# Altium PCB NodeMCU.PcbDoc
Units mm, origin at the board's own origin, x right, y up, seen from the top; angles counter-clockwise.
Board outline 100.36 x 67.08 mm, 2 copper layers (Top Layer, Bottom Layer); 31 components, 34 nets, 202 pads, 11 vias.
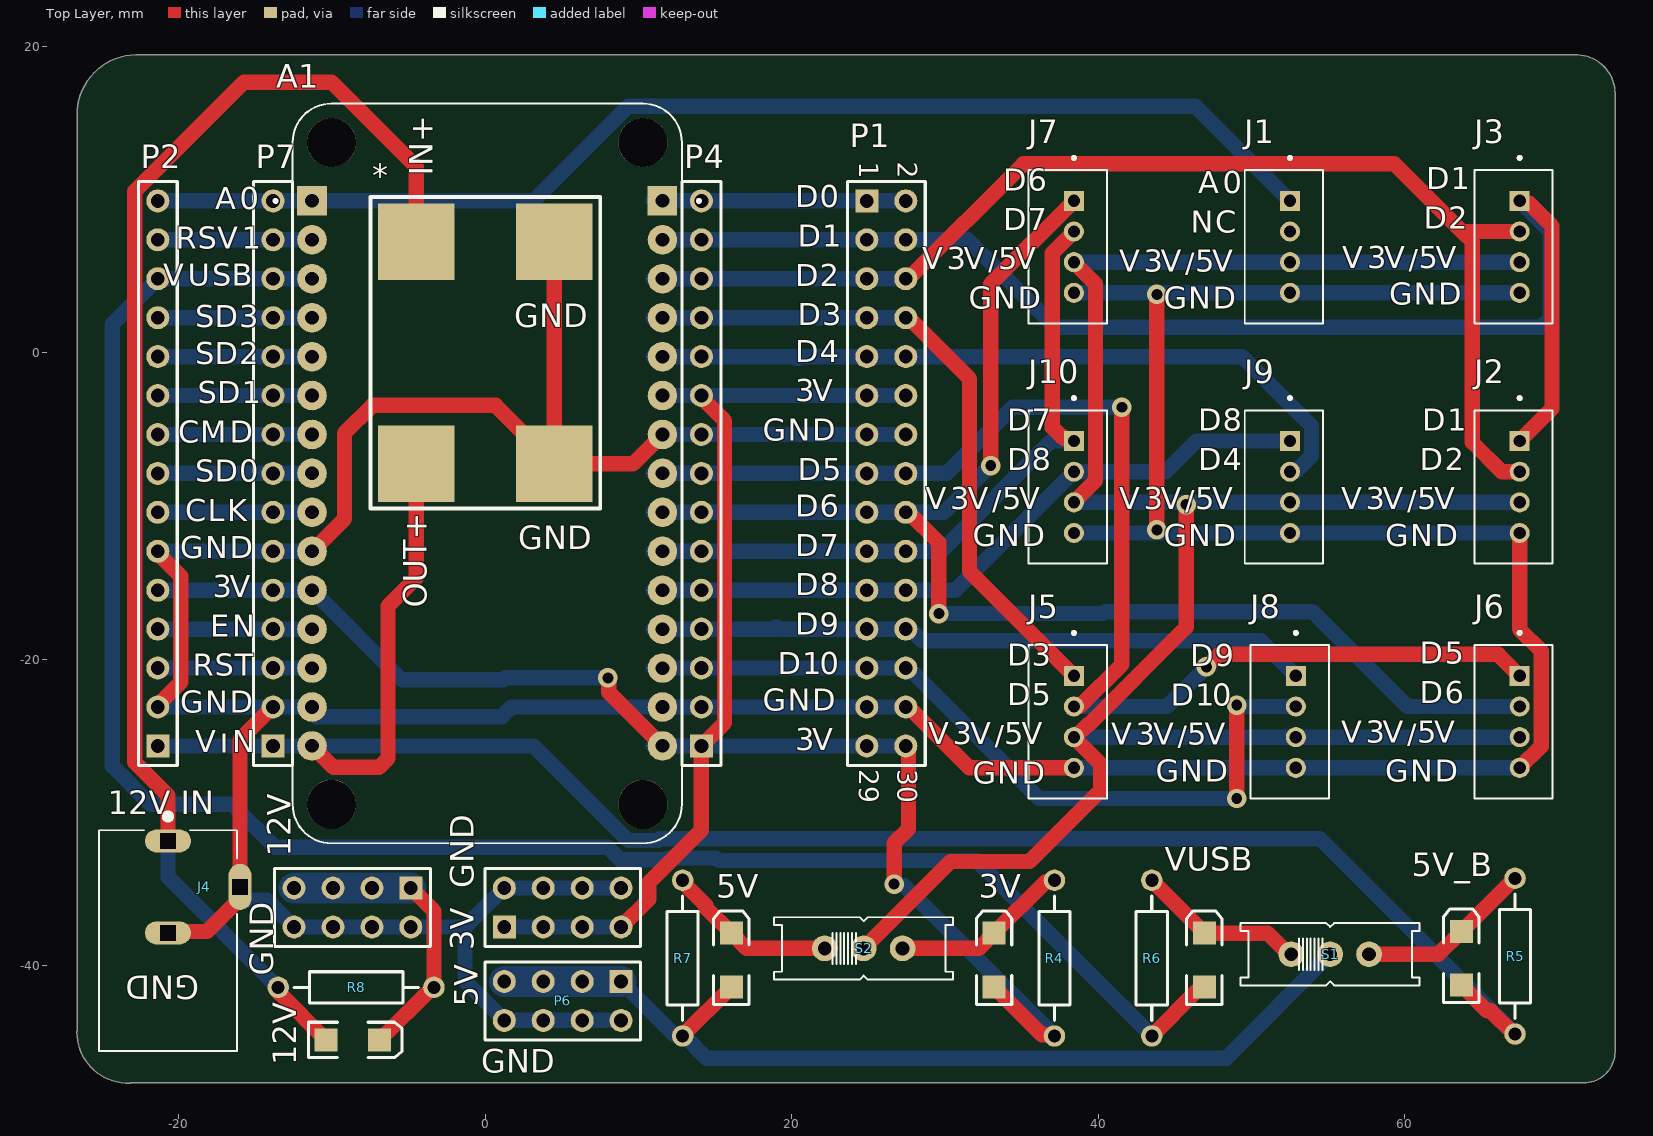
[diagram p0: Top Layer view]
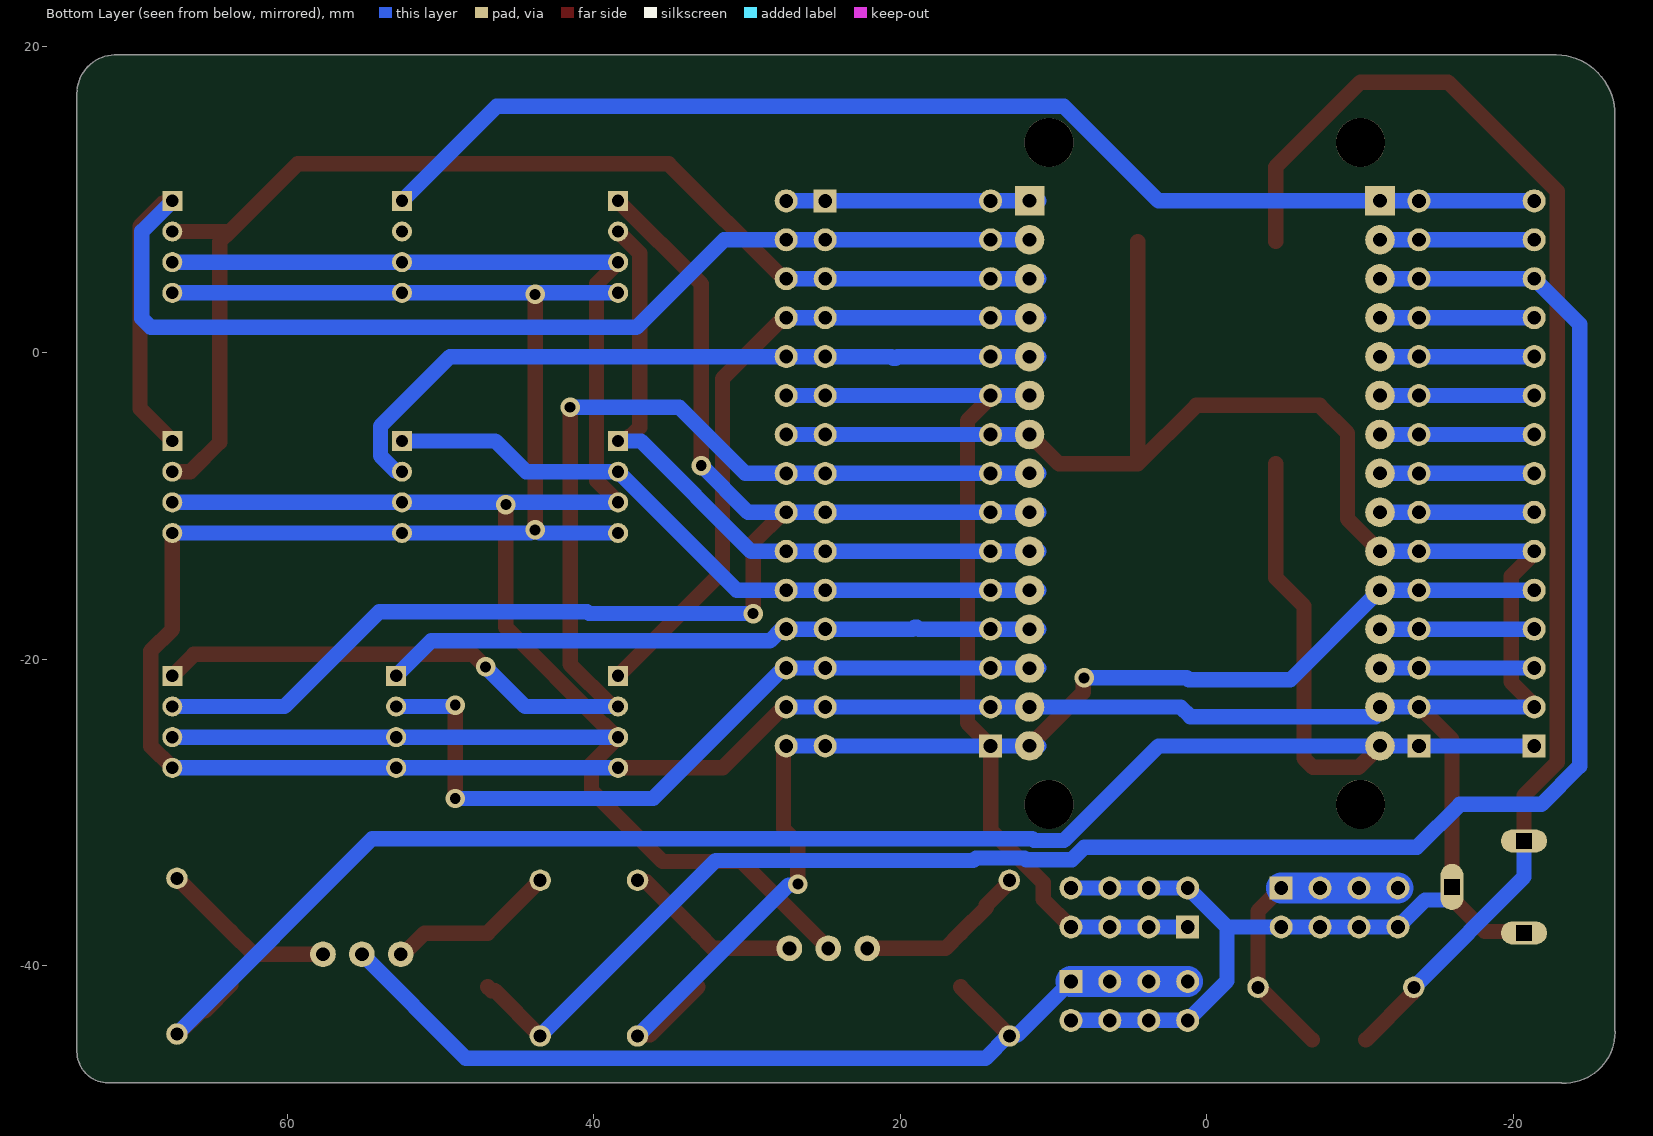
[diagram p1: Bottom Layer view, seen from below]

## Layer stack, top to bottom
Top Solder: solder mask 0.0102, Solder Resist, Dk 3.5
Top Layer: signal copper 0.0356
Dielectric 1: dielectric 0.32, FR-4, Dk 4.8
Bottom Layer: signal copper 0.0356
Bottom Solder: solder mask 0.0102, Solder Resist, Dk 3.5

## Board outline
-26.646,-44.323 ccw(c-23.321,-44.323) -23.188,-47.646 ccw(c-23.193,-47.518) -23.124,-47.625 71.674,-47.625 71.675,-47.625 ccw(c71.675,-45.593) 73.708,-45.593 ccw(c73.58,-45.593) 73.705,-45.569 ccw(c73.58,-45.546) 73.708,-45.546 73.708,16.761 ccw(c71.167,16.891) 73.711,16.891 ccw(c71.167,16.891) 71.037,19.431 -22.813,19.431 ccw(c-22.813,19.304) -22.816,19.431 cw(c-22.814,19.317) -22.815,19.431 -22.816,19.431 ccw(c-22.749,15.557) -26.623,15.493 ccw(c-22.414,15.563) -26.623,15.492 -26.623,15.493 -26.623,-44.25 ccw(c-26.519,-44.323)

## Design rules (kind name [scope] priority, off if disabled: settings)
Clearance [All] p1: gap=0.254 ignorepadtopadclearanceinfootprint=FALSE except(0: Arc-Hole Track-Hole SMDPad-Hole THPad-Hole Via-Hole Fill-Hole Poly-Hole Region-Hole Text-Hole)
ComponentClearance [All] p1 off: gap=0.254 collisioncheckmode=3 verticalgap=0.254 showdistances=FALSE
Height [All] p1 off: minheight=0 maxheight=25.4 prefheight=12.7
PolygonConnect [All] p1: connectstyle=Relief reliefconductorwidth=0.254 reliefentries=4 polygonreliefangle="90 Angle" airgapwidth=0.254
RoutingVias [All] p1: holewidth=0.711 width=1.27 viastyle="Through Hole" minholewidth=0.711 minwidth=1.27 maxholewidth=0.711 maxwidth=1.27
SolderMaskExpansion [All] p1: expansion=0.102 istentingtop=FALSE
Width [All] p1: maxlimit=10 minlimit=0.254 preferedwidth=1 minimp=50.000000 maximp=50.000000 favimp=50.000000
28 further rules are at their usual default settings.

## Classes and differential pairs
component class "node MCU": 3V 5V 5V_B 12V * A1 J1 J2 J3 J4 J5 J6 J7 J8 J9 J10 P1 P2 P4 P6 P7 R4 R5 R6 R7 R8 S1 S2 VUSB

## Components (designator, comment, footprint, x,y, rotation, side; value= is the part's Value field where it differs from the comment)
3V "LED2" 3.2X1.6X1.1 33.194,-39.624 r90 top (schematic designator D2)
3V "Header 4X2" HDR2X4 1.239,-37.465 r0 top (schematic designator P5)
5V "LED2" 3.2X1.6X1.1 16.049,-39.624 r90 top (schematic designator D5)
5V_B "LED2" 3.2X1.6X1.1 63.674,-39.497 r90 top (schematic designator D3)
12V "LED2" 3.2X1.6X1.1 -8.636,-44.831 r0 top (schematic designator D6)
12V "Header 4X2" HDR2X4 -4.857,-34.925 r180 top (schematic designator P8)
* "microbuck" "Micro buck" 0,0 r0 top
A1 "113990105" SEEED_113990105 0.127,-7.874 r0 top
J1 "110990030" SEEED_110990030 52.498,6.906 r270 top
J2 "110990030" SEEED_110990030 67.484,-8.763 r270 top
J3 "110990030" SEEED_110990030 67.484,6.906 r270 top
J4 "PJ-102A" CUI_PJ-102A -20.701,-38.354 r270 top
J5 "110990030" SEEED_110990030 38.401,-24.082 r270 top
J6 "110990030" SEEED_110990030 67.484,-24.082 r270 top
J7 "110990030" SEEED_110990030 38.401,6.906 r270 top
J8 "110990030" SEEED_110990030 52.879,-24.082 r270 top
J9 "110990030" SEEED_110990030 52.498,-8.763 r270 top
J10 "110990030" SEEED_110990030 38.401,-8.763 r270 top
P1 "Header 15X2" HDR2X15 24.892,9.906 r270 top
P2 "Header 15" HDR1X15 -21.367,-25.654 r90 top
P4 "Header 15" HDR1X15 14.097,-25.654 r90 top
P6 "Header 4X2" HDR2X4 8.859,-41.021 r180 top
P7 "Header 15" HDR1X15 -13.843,-25.654 r90 top
R4 "Res2" AXIAL-0.4 37.131,-39.497 r90 top value=1K
R5 "Res2" AXIAL-0.4 67.183,-39.37 r90 top value=1K
R6 "Res2" AXIAL-0.4 43.481,-39.497 r90 top value=1K
R7 "Res2" AXIAL-0.4 12.874,-39.497 r90 top value=1K
R8 "Res2" AXIAL-0.4 -8.429,-41.402 r0 top value=1K
S1 "EG1218" EG1218 55.118,-39.243 r0 top
S2 "EG1218" EG1218 24.685,-38.862 r0 top
VUSB "LED2" 3.2X1.6X1.1 46.91,-39.624 r90 top (schematic designator D4)

## Footprints (in the part's own frame and the unit in brackets; to place one, negate y for a bottom-side part, rotate by r counter-clockwise, add the part's x,y. Pads: shape width x height; smd on the part's side, far side on the other; paste and mask are expansions set on the pad)
3.2X1.6X1.1 [mm] "SMT LED; 2 Flat Leads"
  rect 1.5x1.5 smd: 1(-1.75,0) 2(1.75,0)
  silkscreen extent -2.9,-1.15 3.2,1.15
AXIAL-0.4 [mm] "Axial Device, Thru-Hole; 2 Leads; 0.4 in Pin Spacing"
  round 1.4 hole 0.85: 1(-5.08,0) 2(5.08,0)
  silkscreen extent -4.06,-1.02 4.06,1.02
CUI_PJ-102A [mm]
  oval 1.508x3.016 hole 1 square: 1(-6.5,0) 2(-0.5,0)
  oval 3.016x1.508 hole 1 square: 3(-3.5,4.7)
  silkscreen extent -8.3,-4.5 7.2,4.5, body extent -7.2,-4.5 7.2,4.9, height 11
EG1218 [mil]
  round 66 hole 35.43: O(-100,0) P(0,0) S(100,0)
  silkscreen extent -230,-80 230,80, body extent -228,-276 228,201, height 79
HDR1X15 [mm] "Connector; Header; 15 Position"
  rect 1.5x1.5 hole 0.9: 1(0,0)
  round 1.5 hole 0.9: 2(2.54,0) 3(5.08,0) 4(7.62,0) 5(10.16,0) 6(12.7,0) 7(15.24,0) 8(17.78,0) 9(20.32,0) 10(22.86,0) 11(25.4,0) 12(27.94,0) 13(30.48,0) 14(33.02,0) 15(35.56,0)
  silkscreen extent -1.27,-1.27 36.83,1.27
HDR2X4 [mm] "Connector; Header; 4x2 Position"
  rect 1.5x1.5 hole 0.9: 1(0,0)
  round 1.5 hole 0.9: 2(0,2.54) 3(2.54,0) 4(2.54,2.54) 5(5.08,0) 6(5.08,2.54) 7(7.62,0) 8(7.62,2.54)
  silkscreen extent -1.27,-1.27 8.89,3.81
HDR2X15 [mm] "Connector; Header; 15x2 Position"
  rect 1.5x1.5 hole 0.9: 1(0,0)
  round 1.5 hole 0.9: 2(0,2.54) 3(2.54,0) 4(2.54,2.54) 5(5.08,0) 6(5.08,2.54) 7(7.62,0) 8(7.62,2.54) 9(10.16,0) 10(10.16,2.54) 11(12.7,0) 12(12.7,2.54) 13(15.24,0) 14(15.24,2.54) 15(17.78,0) 16(17.78,2.54) 17(20.32,0) 18(20.32,2.54) 19(22.86,0) 20(22.86,2.54) 21(25.4,0) 22(25.4,2.54) 23(27.94,0) 24(27.94,2.54) 25(30.48,0) 26(30.48,2.54) 27(33.02,0) 28(33.02,2.54) 29(35.56,0) 30(35.56,2.54)
  silkscreen extent -1.27,-1.27 36.83,3.81
"Micro buck" [mm]
  rect 5x5 smd: 1(-4.5,7.25) 2(4.5,7.25) 3(-4.5,-7.25) 4(4.5,-7.25)
  silkscreen extent -7.5,-10.16 7.5,10.16
SEEED_110990030 [mm]
  rect 1.308x1.308 hole 0.8: 1(-3,0)
  round 1.308 hole 0.8: 2(-1,0) 3(1,0) 4(3,0)
  silkscreen extent -5.9,-2.95 5,2.15
SEEED_113990105 [mm]
  rect 1.93x1.93 / inner round 1.93 / far side rect 1.93x1.93 hole 0.889: J1_1(-11.43,17.78) J2_1(11.43,17.78)
  round 1.93 hole 0.889: J1_2(-11.43,15.24) J1_3(-11.43,12.7) J1_4(-11.43,10.16) J1_5(-11.43,7.62) J1_6(-11.43,5.08) J1_7(-11.43,2.54) J1_8(-11.43,0) J1_9(-11.43,-2.54) J1_10(-11.43,-5.08) J1_11(-11.43,-7.62) J1_12(-11.43,-10.16) J1_13(-11.43,-12.7) J1_14(-11.43,-15.24) J1_15(-11.43,-17.78) J2_2(11.43,15.24) J2_3(11.43,12.7) J2_4(11.43,10.16) J2_5(11.43,7.62) J2_6(11.43,5.08) J2_7(11.43,2.54) J2_8(11.43,0) J2_9(11.43,-2.54) J2_10(11.43,-5.08) J2_11(11.43,-7.62) J2_12(11.43,-10.16) J2_13(11.43,-12.7) J2_14(11.43,-15.24) J2_15(11.43,-17.78)
  round 3.2 hole 3.2 unplated: ""(-10.16,-21.59) ""(-10.16,21.59) ""(10.16,-21.59) ""(10.16,21.59)
  silkscreen extent -13.91,-24.13 13.91,24.13

## Part data
3V 5V 5V_B 12V VUSB: "Typical RED, GREEN, YELLOW, AMBER GaAs LED", LatestRevisionDate=17-Jul-2002, LatestRevisionNote="Re-released for DXP Platform.", PackageDescription="SM LED; 2 Flat Leads", PackageReference=3.2X1.6X1.1, PackageVersion=Feb-2002, Published=8-Jun-2000, Publisher="Altium Limited"
3V 12V P6: "Header, 4-Pin, Dual row", LatestRevisionDate=17-Jul-2002, LatestRevisionNote="Re-released for DXP Platform.", Publisher="Altium Limited"
A1: "- ESP8266 Transceiver; 802.11 b/g (Wi-Fi, WiFi, WLAN) 2.4GHz Evaluation Board", Package=None, Availability="In Stock", Check_prices=https://www.snapeda.com/parts/113990105/Seeed+Technology+Co.%252C+Ltd/view-part/?ref=eda, MF="Seeed Technology Co., Ltd", MP=113990105, Price=None, Purchase-URL=https://pricing.snapeda.com/search/part/113990105/?ref=eda, SnapEDA_Link=https://www.snapeda.com/parts/113990105/Seeed+Technology+Co.%252C+Ltd/view-part/?ref=snap
J1 J2 J3 J5 J6 J7 J8 J9 J10: "GROVE 2MM 4PIN VERT CONN 10PCS", Package=None, Arrow_Electronics-Purchase-URL=https://snapeda.com/shop?store=Arrow+Electronics&id=583576, Availability=Good, MF="Seeed Technology", Mouser-Purchase-URL=https://snapeda.com/shop?store=Mouser&id=583576, MP=110990030, Price=None, SnapEDA_Link=https://www.snapeda.com/parts/110990030/Seeed%20Technology%20Co.,%20Ltd/view-part/583576/?ref=snap
J4: "2.0 x 6.5 mm, 2.5 A, Horizontal, Through Hole, Tapered Pins, Dc Power Jack Connector", Package=None, Availability="In Stock", Check_prices=https://www.snapeda.com/parts/PJ-102A/CUI+Devices/view-part/?ref=eda, CUI_purchase_URL=https://www.cuidevices.com/product/interconnect/connectors/dc-power-connectors/jacks/pj-102a?utm_source=snapeda.com&utm_medium=referral&utm_campaign=snapedaBOM, MF="CUI Devices", MP=PJ-102A, Price=None, Purchase-URL=https://pricing.snapeda.com/search/part/PJ-102A/?ref=eda, SnapEDA_Link=https://www.snapeda.com/parts/PJ-102A/CUI+Devices/view-part/?ref=snap
P1: "Header, 15-Pin, Dual row", LatestRevisionDate=17-Jul-2002, LatestRevisionNote="Re-released for DXP Platform.", Publisher="Altium Limited"
P2 P4 P7: "Header, 15-Pin", LatestRevisionDate=17-Jul-2002, LatestRevisionNote="Re-released for DXP Platform.", Publisher="Altium Limited"
R4 R5 R6 R7 R8: "Resistor", LatestRevisionDate=17-Jul-2002, LatestRevisionNote="Re-released for DXP Platform.", PackageDescription="Axial Device, Thru-Hole; 2 Leads; 0.4 in Pin Spacing", PackageReference=AXIAL-0.4, Published=8-Jun-2000, Publisher="Altium Limited"
S1 S2: "Slide Switch SPDT Through Hole", Package=None, Availability="In Stock", Check_prices=https://www.snapeda.com/parts/EG1218/E-Switch/view-part/?ref=eda, MF=E-Switch, MP=EG1218, Price=None, Purchase-URL=https://pricing.snapeda.com/search/part/EG1218/?ref=eda, SnapEDA_Link=https://www.snapeda.com/parts/EG1218/E-Switch/view-part/?ref=snap

## Via types
v1: diameter 1.27, hole 0.711, Top Layer to Bottom Layer, 11 vias

## Nets (pads, with @x,y where several pads share a name; then routed paths per layer and width w, separated by ;. In a path a pad name is that pad's centre, name@x,y a point inside that pad or via, vN(x,y) a via of type N, cw(c..) or ccw(c..) an arc to the next point about the centre after c; other vN are vias at no path point)
GND: 3V.2@1.239,-34.925 3V.4 3V.6 3V.8 12V.2@-4.857,-37.465 12V.4 12V.6 12V.8 *.2 *.4 A1.J1_10 A1.J1_14 A1.J2_7 A1.J2_14 J1.4 J2.4 J3.4 J4.2 J4.3 J5.4 J6.4 J7.4 J8.4 J9.4 J10.4 P1.13 P1.14 P1.27 P1.28 P2.2 P2.6 P4.2 P4.9 P6.2 P6.4 P6.6 P6.8 P7.2 P7.6 | length 326.6
  Top Layer w1: P2.2 -21.367,-22.979 -19.863,-21.475 -19.863,-14.593 -21.367,-13.089 P2.6 ; J4.2 -20.604,-37.757 -18.15,-37.757 -16.001,-35.608 J4.3 -16.001,-25.246 -13.869,-23.114 P7.2 ; A1.J1_10 -9.183,-10.834 -9.183,-5.246 -7.366,-3.429 0.679,-3.429 *.4 ; *.2 *.4 ; A1.J2_7 9.641,-7.25 *.4 ; P1.28@27.606,-23.114 31.574,-27.082 J5.4 ; v1(43.815,-11.557) v1(43.815,3.81) ; J6.4 67.484,-27.073 68.892,-25.665 68.892,-19.46 67.484,-18.052 J2.4
  Bottom Layer w1: P2.2 P7.2 -11.651,-23.114 -11.016,-23.749 1.063,-23.749 1.698,-23.114 A1.J2_14 P4.2 P1.27 P1.28 P1.28@27.606,-23.114 ; P2.6 P7.6 A1.J1_10@-11.903,-12.954 ; J4.3 -16.001,-35.471 -15.766,-35.705 -14.237,-35.705 12V.8 12V.6 12V.4 -4.857,-37.465 -1.327,-37.465 ; P6.2 P6.4 P6.6 P6.8 -1.327,-40.995 -1.327,-37.465 ; 3V.8 3V.6 3V.4 1.239,-34.925 1.213,-34.925 -1.327,-37.465 ; A1.J2_7@11.305,-5.334 A1.J2_7 P4.9 P1.13 P1.14 P1.14@27.606,-5.334 ; J5.4 J8.4 J6.4 ; J10.4 43.536,-11.763 43.742,-11.557 v1(43.815,-11.557) 43.888,-11.557 44.094,-11.763 J9.4 J2.4 ; J7.4 43.646,3.906 43.742,3.81 v1(43.815,3.81) 43.888,3.81 43.984,3.906 J1.4 J3.4
Net*_1: 12V.1@-10.386,-44.831 *.1 J4.1 R8.1 | length 89
  Top Layer w1: J4.1 -20.701,-28.886 -22.871,-26.716 -22.871,10.529 -15.747,17.653 -10.033,17.653 -4.5,12.12 *.1 ; R8.1 -13.433,-41.479 -13.433,-41.784 12V.1@-10.386,-44.831
  Bottom Layer w1: J4.1 -20.701,-34.21 R8.1
Net*_3: 5V_B.1 *.3 A1.J1_15 P2.1 P7.1 R5.1 | length 126.4
  Top Layer w1: A1.J1_15 -9.906,-27.051 -6.936,-27.051 -6.35,-26.465 -6.35,-16.522 -4.5,-14.672 *.3 ; 5V_B.1 65.362,-42.935 65.587,-42.935 67.101,-44.45 R5.1
  Bottom Layer w1: P2.1 P7.1 A1.J1_15@-11.903,-25.654 ; A1.J1_15 3.148,-25.654 9.312,-31.818 11.262,-31.818 11.371,-31.709 54.442,-31.709 R5.1
NetA1_J1_1: A1.J1_1 J1.1 P2.15 P7.15 | length 78.4
  Bottom Layer w1: P2.15 P7.15 A1.J1_1@-11.903,9.906 ; A1.J1_1 3.148,9.906 9.312,16.07 46.334,16.07 J1.1
NetA1_J1_2: A1.J1_2 P2.14 P7.14 | length 9.5
  Bottom Layer w1: P2.14 -14.443,7.366 A1.J1_2@-11.903,7.366
NetA1_J1_3: A1.J1_3 P2.13 P7.13 R6.1 VUSB.1 | length 123
  Top Layer w1: R6.1 46.434,-41.624 46.66,-41.624 VUSB.1
  Bottom Layer w1: A1.J1_3 P7.13 P2.13 -24.329,1.864 -24.329,-26.979 -21.844,-29.464 -16.51,-29.464 -13.716,-32.258 7.979,-32.258 8.793,-33.072 11.781,-33.072 11.89,-32.963 15.056,-32.963 15.224,-33.131 32.035,-33.131 R6.1
NetA1_J1_4: A1.J1_4 P2.12 P7.12 | length 9.5
  Bottom Layer w1: P2.12 -14.443,2.286 A1.J1_4@-11.903,2.286
NetA1_J1_5: A1.J1_5 P2.11 P7.11 | length 9.5
  Bottom Layer w1: P2.11 -14.443,-0.254 A1.J1_5@-11.903,-0.254
NetA1_J1_6: A1.J1_6 P2.10 P7.10 | length 9.5
  Bottom Layer w1: P2.10 -14.443,-2.794 A1.J1_6@-11.903,-2.794
NetA1_J1_7: A1.J1_7 P2.9 P7.9 | length 9.5
  Bottom Layer w1: P2.9 -14.443,-5.334 A1.J1_7@-11.903,-5.334
NetA1_J1_8: A1.J1_8 P2.8 P7.8 | length 9.5
  Bottom Layer w1: P2.8 -14.443,-7.874 A1.J1_8@-11.903,-7.874
NetA1_J1_9: A1.J1_9 P2.7 P7.7 | length 9.5
  Bottom Layer w1: P2.7 -14.443,-10.414 A1.J1_9@-11.903,-10.414
NetA1_J1_11: 3V.1 3V.3 3V.5 3V.7 A1.J1_11 A1.J2_6 A1.J2_15 P1.11 P1.12 P1.29 P1.30 P2.5 P4.1 P4.10 P7.5 R4.1 | length 145.4
  Top Layer w1: v1(8.001,-21.209) 8.053,-21.261 8.053,-22.15 A1.J2_15 ; 3V.7 10.668,-35.656 10.668,-34.567 14.097,-31.138 P4.1 15.601,-24.15 15.601,-4.433 14.097,-2.929 P4.10 ; v1(26.67,-34.671) 26.67,-31.996 27.606,-31.06 P1.30@27.606,-25.654 ; 3V.1@33.194,-41.374 36.321,-44.5 37.055,-44.5 R4.1
  Bottom Layer w1: P2.5 P7.5 A1.J1_11 -5.461,-21.336 1.17,-21.336 1.297,-21.209 v1(8.001,-21.209) ; 3V.1@1.239,-37.465 3V.3 3V.5 3V.7 ; A1.J2_15@10.957,-25.654 A1.J2_15 P4.1 P1.29 P1.30 P1.30@27.606,-25.654 ; A1.J2_6 P4.10 P1.11 P1.12 P1.12@27.606,-2.794 ; v1(26.67,-34.671) 26.722,-34.723 27.277,-34.723 R4.1
NetA1_J1_12: A1.J1_12 P2.4 P7.4 | length 9.5
  Bottom Layer w1: P2.4 -14.443,-18.034 A1.J1_12@-11.903,-18.034
NetA1_J1_13: A1.J1_13 P2.3 P7.3 | length 9.5
  Bottom Layer w1: P2.3 -14.443,-20.574 A1.J1_13@-11.903,-20.574
NetA1_J2_1: A1.J2_1 P1.1 P1.2 P4.15 | length 16.6
  Bottom Layer w1: A1.J2_1@10.957,9.906 13.497,9.906 25.066,9.906 P1.2@27.606,9.906
NetA1_J2_2: A1.J2_2 J2.1 J3.1 P1.3 P1.4 P4.14 | length 86.7
  Top Layer w1: J2.1 69.596,-3.651 69.596,8.255 68.099,9.752 67.638,9.752 J3.1
  Bottom Layer w1: A1.J2_2 P4.14 25.066,7.366 27.606,7.366 31.496,7.366 37.211,1.651 68.883,1.651 69.469,2.237 69.469,7.921 J3.1
NetA1_J2_3: A1.J2_3 J2.2 J3.2 P1.5 P1.6 P4.13 | length 79.3
  Top Layer w1: P1.6@27.606,4.826 35.099,12.319 59.309,12.319 63.722,7.906 ; J2.2@67.401,-7.763 66.31,-7.763 64.389,-5.842 64.389,7.239 63.722,7.906 ; J3.2 63.722,7.906
  Bottom Layer w1: A1.J2_3@10.957,4.826 25.066,4.826 P1.6@27.606,4.826
NetA1_J2_4: A1.J2_4 J5.1 P1.7 P1.8 P4.12 | length 44.7
  Top Layer w1: P1.8@27.606,2.286 31.585,-1.693 31.585,-14.266 J5.1
  Bottom Layer w1: A1.J2_4@10.957,2.286 25.066,2.286 P1.8@27.606,2.286 ; J5.1 J5.1@38.528,-20.955
NetA1_J2_5: A1.J2_5 J9.2 P1.9 P1.10 P4.11 | length 48.3
  Bottom Layer w1: A1.J2_5@10.957,-0.254 20.167,-0.254 ; 20.294,-0.381 20.44,-0.381 ; 20.567,-0.254 25.066,-0.254 27.606,-0.254 49.363,-0.254 53.906,-4.797 53.906,-6.729 52.931,-7.704 52.557,-7.704 J9.2
NetA1_J2_8: A1.J2_8 J5.2 J6.1 P1.15 P1.16 P4.8 | length 84.5
  Top Layer w1: J5.2 38.46,-23.023 38.834,-23.023 41.529,-20.328 v1(41.529,-3.556) ; v1(47.043,-20.5) 47.869,-19.674 66.076,-19.674 J6.1
  Bottom Layer w1: A1.J2_8@10.957,-7.874 A1.J2_8 P4.8 25.066,-7.874 27.606,-7.874 30.099,-7.874 34.417,-3.556 v1(41.529,-3.556) ; J5.2 44.461,-23.082 v1(47.043,-20.5)
NetA1_J2_9: A1.J2_9 J6.2 J7.1 P1.17 P1.18 P4.7 | length 90.7
  Top Layer w1: P1.18@27.606,-10.414 29.591,-12.399 v1(29.591,-17.018) ; v1(32.974,-7.366) 32.974,4.479 J7.1
  Bottom Layer w1: A1.J2_9@10.957,-10.414 A1.J2_9 P4.7 25.066,-10.414 27.606,-10.414 27.609,-10.411 29.929,-10.411 v1(32.974,-7.366) ; v1(29.591,-17.018) 40.3,-17.018 40.427,-16.891 53.975,-16.891 60.166,-23.082 J6.2
NetA1_J2_10: A1.J2_10 J7.2 J10.1 P1.19 P1.20 P4.6 | length 45.6
  Top Layer w1: J10.1 38.247,-5.609 37.809,-5.609 37.661,-5.461 37.579,-5.461 36.993,-4.875 36.993,6.489 38.401,7.897 J7.2
  Bottom Layer w1: A1.J2_10@10.957,-12.954 25.066,-12.954 29.718,-12.954 36.909,-5.763 J10.1
NetA1_J2_11: A1.J2_11 J9.1 J10.2 P1.21 P1.22 P4.5 | length 45.6
  Bottom Layer w1: A1.J2_11@10.957,-15.494 A1.J2_11 P4.5 25.066,-15.494 27.606,-15.494 30.67,-15.494 J10.2 44.414,-7.763 46.414,-5.763 J9.1
NetA1_J2_12: A1.J2_12 J8.1 P1.23 P1.24 P4.4 | length 43.3
  Bottom Layer w1: A1.J2_12@10.957,-18.034 18.77,-18.034 18.897,-17.907 19.043,-17.907 19.17,-18.034 25.066,-18.034 27.741,-18.034 28.503,-18.796 50.593,-18.796 J8.1
NetA1_J2_13: A1.J2_13 J8.2 P1.25 P1.26 P4.3 | length 51.6
  Top Layer w1: v1(49.022,-29.083) v1(49.022,-22.987)
  Bottom Layer w1: A1.J2_13@10.957,-20.574 25.066,-20.574 27.606,-20.574 36.115,-29.083 v1(49.022,-29.083) ; v1(49.022,-22.987) 49.117,-23.082 J8.2
NetD2_2: 3V.2@33.194,-37.874 R4.2 S2.S | length 11.7
  Top Layer w1: S2.S 32.206,-38.862 33.194,-37.874 36.575,-34.494 37.055,-34.494 R4.2
NetD3_2: 5V_B.2 R5.2 S1.S | length 11.6
  Top Layer w1: S1.S 62.178,-39.243 5V_B.2 67.131,-34.29 R5.2
NetD4_2: R6.2 S1.O VUSB.2 | length 11.1
  Top Layer w1: R6.2 43.481,-34.445 VUSB.2 51.026,-37.874 52.395,-39.243 S1.O
NetD5_1: 5V.1 P6.1 P6.3 P6.5 P6.7 R7.1 S1.P | length 63.3
  Top Layer w1: R7.1 12.874,-44.549 5V.1
  Bottom Layer w1: P6.1 12.339,-44.5 12.798,-44.5 R7.1 12.982,-44.577 14.436,-46.031 48.33,-46.031 S1.P
  Bottom Layer w2: P6.7 P6.5 P6.3 P6.1
NetD5_2: 5V.2 R7.2 S2.O | length 11.3
  Top Layer w1: R7.2 12.874,-34.525 14.375,-36.026 14.375,-36.2 5V.2 17.037,-38.862 S2.O
NetD6_2: 12V.1@-4.857,-34.925 12V.2@-6.886,-44.831 12V.3 12V.5 12V.7 R8.2 | length 19.7
  Top Layer w1: 12V.2@-6.886,-44.831 -3.457,-41.402 R8.2 -3.349,-36.433 12V.1@-4.857,-34.925
  Bottom Layer w2: 12V.7 12V.5 12V.3 12V.1@-4.857,-34.925
NetJ1_2: J1.2
NetJ1_3: J1.3 J2.3 J3.3 J5.3 J6.3 J7.3 J8.3 J9.3 J10.3 S2.P | length 146.3
  Top Layer w1: S2.P 30.348,-33.199 35.508,-33.199 40.132,-28.575 40.132,-26.822 38.401,-25.091 J5.3 38.484,-25.082 39.289,-24.277 39.354,-24.277 45.72,-17.911 v1(45.72,-9.906) ; J10.3 38.401,-9.754 39.809,-8.346 39.809,4.489 38.401,5.897 J7.3
  Bottom Layer w1: J5.3 J8.3 J6.3 ; J10.3 J9.3 J2.3 ; J7.3 J1.3 J3.3
pads on no net: A1.

## Silkscreen, mask and mechanical layers (free items; w line width, h text height)
Top Overlay:
  text "IN+" at -3.429,11.557 h1.52 r90
  text "D" at 61.395,10.16 h2.49
  text "1" at 62.996,10.16 h2.49
  text "D" at 33.802,10.066 h2.49
  text "6" at 35.403,10.066 h2.49
  text "A" at 46.502,9.906 h2.49
  text "0" at 48.103,9.906 h2.49
  text "D" at 20.208,8.984 h2.49
  text "0" at 21.81,8.984 h2.49
  text "A" at -17.633,8.856 h2.49
  text "0" at -16.032,8.856 h2.49
  text "D" at 61.234,7.597 h2.49
  text "2" at 62.835,7.597 h2.49
  text "D" at 33.802,7.503 h2.49
  text "7" at 35.403,7.503 h2.49
  text "N" at 46.019,7.343 h2.49
  text "C" at 47.621,7.343 h2.49
  text "D" at 20.369,6.421 h2.49
  text "1" at 21.971,6.421 h2.49
  text "R" at -20.208,6.293 h2.49
  text "S" at -18.767,6.293 h2.49
  text "V" at -17.485,6.293 h2.49
  text "1" at -15.883,6.293 h2.49
  text "V" at 55.923,5.034 h2.49
  text "3" at 57.525,5.034 h2.49
  text "V" at 58.646,5.034 h2.49
  text "/" at 60.248,5.034 h2.49
  text "5" at 60.888,5.034 h2.49
  text "V" at 62.01,5.034 h2.49
  text "V" at 28.491,4.94 h2.49
  text "3" at 30.093,4.94 h2.49
  text "V" at 31.214,4.94 h2.49
  text "/" at 32.816,4.94 h2.49
  text "5" at 33.456,4.94 h2.49
  text "V" at 34.578,4.94 h2.49
  text "V" at 41.352,4.78 h2.49
  text "3" at 42.953,4.78 h2.49
  text "V" at 44.075,4.78 h2.49
  text "/" at 45.677,4.78 h2.49
  text "5" at 46.317,4.78 h2.49
  text "V" at 47.439,4.78 h2.49
  text "V" at -21.013,3.891 h2.49
  text "U" at -19.411,3.891 h2.49
  text "S" at -17.809,3.891 h2.49
  text "B" at -16.528,3.891 h2.49
  text "D" at 20.208,3.858 h2.49
  text "2" at 21.81,3.858 h2.49
  text "G" at 58.98,2.631 h2.49
  text "N" at 60.582,2.631 h2.49
  text "D" at 62.184,2.631 h2.49
  text "G" at 31.548,2.377 h2.49
  text "N" at 33.15,2.377 h2.49
  text "D" at 34.752,2.377 h2.49
  text "G" at 44.248,2.377 h2.49
  text "N" at 45.85,2.377 h2.49
  text "D" at 47.452,2.377 h2.49
  text "GND" at 1.905,1.651 h1.52
  text "D" at 20.369,1.295 h2.49
  text "3" at 21.971,1.295 h2.49
  text "S" at -18.921,1.167 h2.49
  text "D" at -17.639,1.167 h2.49
  text "3" at -16.038,1.167 h2.49
  text "D" at 20.208,-1.107 h2.49
  text "4" at 21.81,-1.107 h2.49
  text "S" at -18.921,-1.235 h2.49
  text "D" at -17.639,-1.235 h2.49
  text "2" at -16.038,-1.235 h2.49
  text "3" at 20.208,-3.67 h2.49
  text "V" at 21.33,-3.67 h2.49
  text "S" at -18.76,-3.798 h2.49
  text "D" at -17.478,-3.798 h2.49
  text "1" at -15.877,-3.798 h2.49
  text "D" at 34.056,-5.588 h2.49
  text "7" at 35.657,-5.588 h2.49
  text "D" at 46.502,-5.588 h2.49
  text "8" at 48.103,-5.588 h2.49
  text "D" at 61.141,-5.588 h2.49
  text "1" at 62.742,-5.588 h2.49
  text "G" at 18.116,-6.233 h2.49
  text "N" at 19.718,-6.233 h2.49
  text "D" at 21.32,-6.233 h2.49
  text "C" at -20.047,-6.361 h2.49
  text "M" at -18.606,-6.361 h2.49
  text "D" at -16.684,-6.361 h2.49
  text "D" at 34.056,-8.151 h2.49
  text "8" at 35.657,-8.151 h2.49
  text "D" at 46.502,-8.151 h2.49
  text "4" at 48.103,-8.151 h2.49
  text "D" at 60.98,-8.151 h2.49
  text "2" at 62.581,-8.151 h2.49
  text "D" at 20.369,-8.796 h2.49
  text "5" at 21.971,-8.796 h2.49
  text "S" at -18.921,-8.924 h2.49
  text "D" at -17.639,-8.924 h2.49
  text "0" at -16.038,-8.924 h2.49
  text "V" at 28.745,-10.714 h2.49
  text "3" at 30.347,-10.714 h2.49
  text "V" at 31.468,-10.714 h2.49
  text "/" at 33.07,-10.714 h2.49
  text "5" at 33.71,-10.714 h2.49
  text "V" at 34.832,-10.714 h2.49
  text "V" at 41.352,-10.714 h2.49
  text "3" at 42.953,-10.714 h2.49
  text "V" at 44.075,-10.714 h2.49
  text "/" at 45.677,-10.714 h2.49
  text "5" at 46.317,-10.714 h2.49
  text "V" at 47.439,-10.714 h2.49
  text "V" at 55.83,-10.714 h2.49
  text "3" at 57.431,-10.714 h2.49
  text "V" at 58.553,-10.714 h2.49
  text "/" at 60.155,-10.714 h2.49
  text "5" at 60.795,-10.714 h2.49
  text "V" at 61.917,-10.714 h2.49
  text "D" at 20.208,-11.199 h2.49
  text "6" at 21.81,-11.199 h2.49
  text "C" at -19.565,-11.487 h2.49
  text "L" at -18.123,-11.487 h2.49
  text "K" at -16.841,-11.487 h2.49
  text "GND" at 2.159,-12.827 h1.52
  text "G" at 31.802,-13.117 h2.49
  text "N" at 33.404,-13.117 h2.49
  text "D" at 35.006,-13.117 h2.49
  text "G" at 44.248,-13.117 h2.49
  text "N" at 45.85,-13.117 h2.49
  text "D" at 47.452,-13.117 h2.49
  text "G" at 58.726,-13.117 h2.49
  text "N" at 60.328,-13.117 h2.49
  text "D" at 61.93,-13.117 h2.49
  text "D" at 20.208,-13.762 h2.49
  text "7" at 21.81,-13.762 h2.49
  text "G" at -19.887,-13.89 h2.49
  text "N" at -18.285,-13.89 h2.49
  text "D" at -16.683,-13.89 h2.49
  text "D" at 20.208,-16.325 h2.49
  text "8" at 21.81,-16.325 h2.49
  text "3" at -17.794,-16.453 h2.49
  text "V" at -16.673,-16.453 h2.49
  text "OUT+" at -3.81,-16.637 h1.52 r90
  text "D" at 20.208,-18.888 h2.49
  text "9" at 21.81,-18.888 h2.49
  text "E" at -17.955,-19.016 h2.49
  text "N" at -16.514,-19.016 h2.49
  text "D" at 60.98,-20.795 h2.49
  text "5" at 62.581,-20.795 h2.49
  text "D" at 34.056,-20.922 h2.49
  text "3" at 35.657,-20.922 h2.49
  text "D" at 45.994,-20.955 h2.49
  text "9" at 47.595,-20.955 h2.49
  text "D" at 19.082,-21.451 h2.49
  text "1" at 20.683,-21.451 h2.49
  text "0" at 21.805,-21.451 h2.49
  text "R" at -19.082,-21.579 h2.49
  text "S" at -17.64,-21.579 h2.49
  text "T" at -16.359,-21.579 h2.49
  text "D" at 60.98,-23.358 h2.49
  text "6" at 62.581,-23.358 h2.49
  text "D" at 34.056,-23.485 h2.49
  text "5" at 35.657,-23.485 h2.49
  text "D" at 44.706,-23.518 h2.49
  text "1" at 46.308,-23.518 h2.49
  text "0" at 47.429,-23.518 h2.49
  text "G" at 18.116,-23.854 h2.49
  text "N" at 19.718,-23.854 h2.49
  text "D" at 21.32,-23.854 h2.49
  text "G" at -19.887,-23.982 h2.49
  text "N" at -18.285,-23.982 h2.49
  text "D" at -16.683,-23.982 h2.49
  text "V" at 55.83,-25.921 h2.49
  text "3" at 57.431,-25.921 h2.49
  text "V" at 58.553,-25.921 h2.49
  text "/" at 60.155,-25.921 h2.49
  text "5" at 60.795,-25.921 h2.49
  text "V" at 61.917,-25.921 h2.49
  text "V" at 28.906,-26.048 h2.49
  text "3" at 30.507,-26.048 h2.49
  text "V" at 31.629,-26.048 h2.49
  text "/" at 33.231,-26.048 h2.49
  text "5" at 33.871,-26.048 h2.49
  text "V" at 34.993,-26.048 h2.49
  text "V" at 40.844,-26.081 h2.49
  text "3" at 42.445,-26.081 h2.49
  text "V" at 43.567,-26.081 h2.49
  text "/" at 45.169,-26.081 h2.49
  text "5" at 45.809,-26.081 h2.49
  text "V" at 46.931,-26.081 h2.49
  text "3" at 20.208,-26.417 h2.49
  text "V" at 21.33,-26.417 h2.49
  text "V" at -18.921,-26.545 h2.49
  text "I" at -17.319,-26.545 h2.49
  text "N" at -16.518,-26.545 h2.49
  text "G" at 43.74,-28.484 h2.49
  text "N" at 45.342,-28.484 h2.49
  text "D" at 46.944,-28.484 h2.49
  text "G" at 58.726,-28.484 h2.49
  text "N" at 60.328,-28.484 h2.49
  text "D" at 61.93,-28.484 h2.49
  text "G" at 31.802,-28.611 h2.49
  text "N" at 33.404,-28.611 h2.49
  text "D" at 35.006,-28.611 h2.49
  text "12V IN" at -24.638,-30.099 h1.52
  text "GND" at -0.762,-34.925 h1.52 r90
  text "GND" at -18.669,-40.64 h1.52 r180
  text "GND" at -13.843,-40.64 h1.52 r90
  text "5V" at -0.508,-42.672 h1.52 r90
  text "GND" at -0.254,-46.99 h1.52
Mechanical 15:
  lines w0.254: -26.519,-44.323 ccw(c-23.321,-44.323) -23.193,-47.518 ; -26.496,-44.323 -26.496,15.494 cw(c-22.749,15.557) -22.813,19.304 71.04,19.304 cw(c71.167,16.891) 73.58,16.764 73.58,-45.546 ; -23.495,-47.498 71.675,-47.498 ccw(c71.675,-45.593) 73.58,-45.593

## Text inside footprints (layer, text, board x,y; h text height)
P1: Top Overlay "1" at 24.384,12.446 h1.27 r270; Top Overlay "2" at 26.924,12.446 h1.27 r270; Top Overlay "29" at 24.384,-27.178 h1.27 r270; Top Overlay "30" at 26.924,-27.178 h1.27 r270